# Allegro board BD95861MUVEVK-101_BRD_REV01_2014-01-22.brd
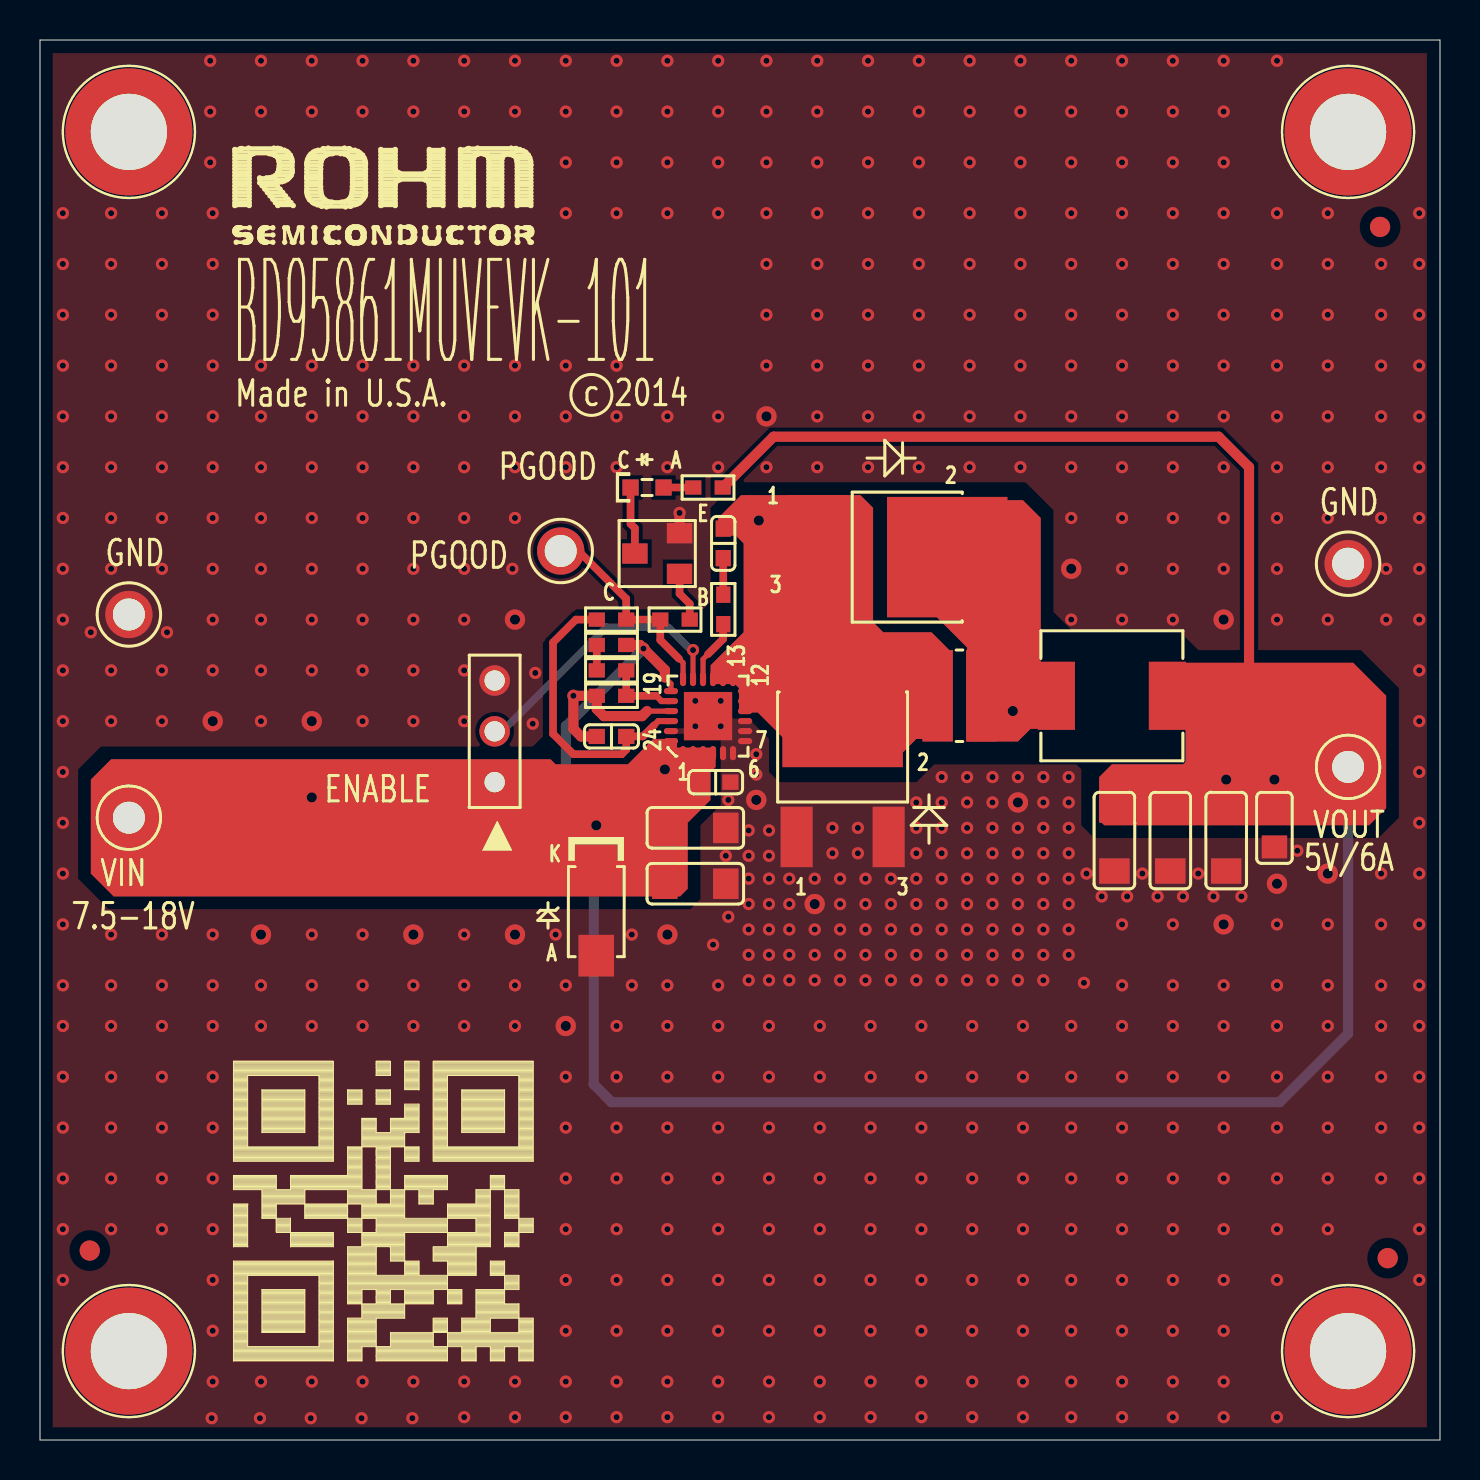
[diagram p0: board, top side]
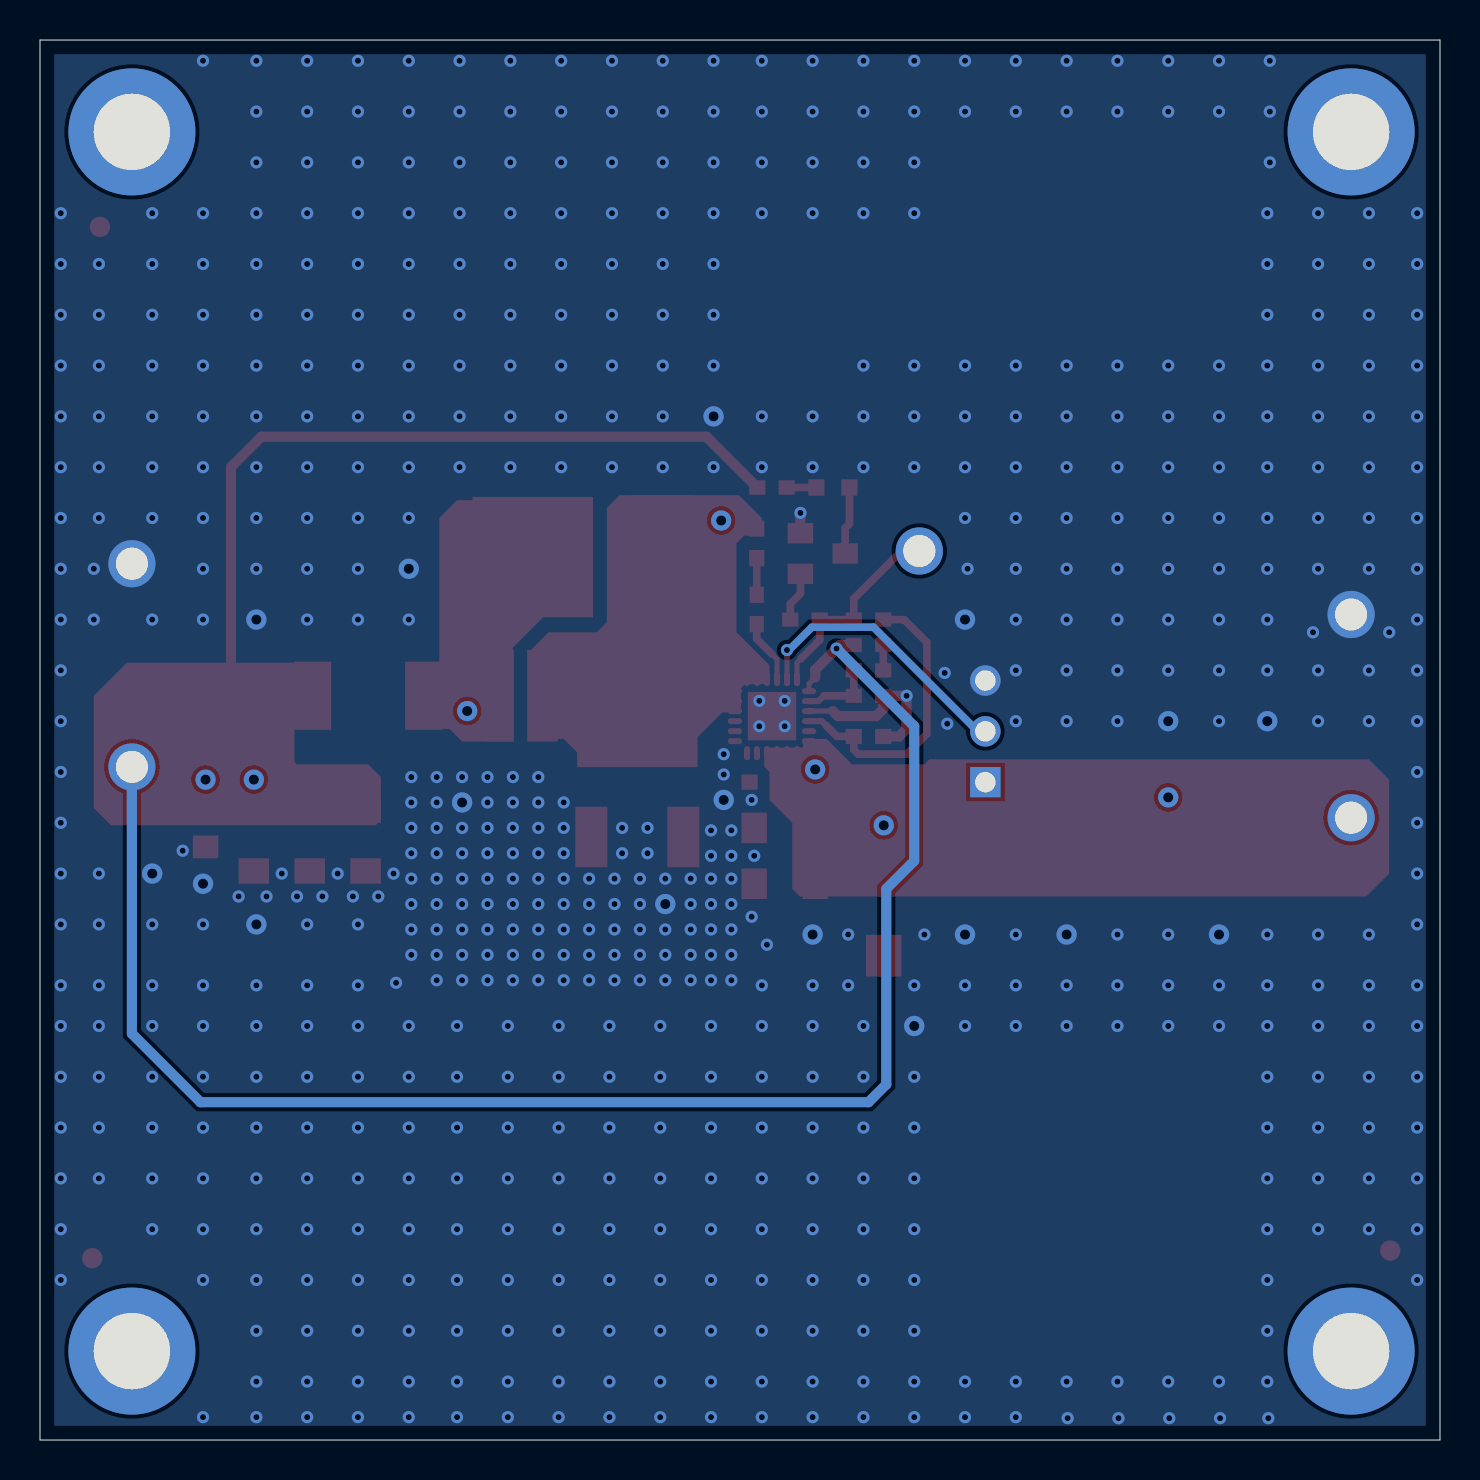
[diagram p1: board, bottom side, seen from below]

Outline 70 x 70 mm; copper layers: TOP, L2_GND, L3_GND, BOTTOM. Coordinates in mm from the lower left corner of the outline.
Outline path: 0,70 0,0 70,0 70,70 0,70

## Placement (name value [footprint] x y rotation side)
C1  10uF  [C1206]  32.77 27.81 0 top
C2  10uF  [C1206]  32.77 30.61 0 top
C3  0.1uF  [C0603]  34.16 44.83 90 top
C4  22uF  [C1206]  59.31 29.97 270 top
C5  22uF  [C1206]  56.52 29.97 270 top
C6  4.7uF  [C0603]  28.57 35.18 0 top
C7  0.47uF  [C0603]  33.78 32.89 180 top
C8  Val  [C1206]  53.72 29.97 270 top
C9  Val  [C0805]  61.72 30.61 270 top
CR1  SML-310MTT86  [LED_0603]  30.35 47.62 270 top
D1  SMAJ15A  [DO-214AC]  27.81 26.42 270 top
D2  RB085B-30TL  [CPD]  40.13 33.4 0 top
D3  RB085B-30TL  [CPD]  42.11 44.14 270 top
J1  87224-3  [HDR_THVT_1X3_100]  22.73 32.89 90 top
L1  2.2uH  [SMT_7P1X6P5]  53.59 37.21 0 top
NOREF  -  []  70 0 90 top
NOREF#2  -  []  -12.5 -32.37 0 top
NOREF#3  -  [unnamed#2]  67 60.65 0 top
NOREF#4  -  [unnamed#2]  67.39 9.09 0 top
NOREF#5  -  [unnamed#3]  4.45 4.45 0 top
NOREF#6  -  [unnamed#3]  4.45 65.41 0 top
NOREF#7  -  [unnamed#3]  65.41 65.41 0 top
NOREF#8  -  [unnamed#2]  2.49 9.47 0 top
NOREF#9  -  []  0 70 0 top
NOREF#10  -  [unnamed#3]  65.41 4.45 0 top
Q1  SST2222AT116  [SOT23_BEC]  30.86 44.32 90 top
R1  20  [R0603]  34.16 41.53 270 top
R2  24K  [R0603]  28.57 38.48 0 top
R3  680  [R0603]  28.57 39.75 180 top
R4  4.7K  [R0603]  28.57 37.21 0 top
R5  100K  [R0603]  28.57 41.02 180 top
R6  1K  [R0603]  31.75 41.02 0 top
R7  140  [R0603]  33.4 47.62 0 top
TP1  TP_63Mil_TH  [TP_TH]  4.45 31.12 0 top
TP2  TP_63Mil_TH  [TP_TH]  65.41 33.66 0 top
TP3  TP_63Mil_TH  [TP_TH]  4.45 41.27 0 top
TP4  TP_63Mil_TH  [TP_TH]  65.41 43.81 0 top
TP5  TP_63Mil_TH  [TP_TH]  26.04 44.45 0 top
U1  BD95861MUV  [VQFN024V4040]  33.4 36.2 90 top
ZX1  0  [SM_180X060]  45.97 37.21 180 top

## Library data of the parts
C1 C2 = CAP1206_10uF_25V_20%
C3 = CAP0603_0.1uF_50V_10%
C4 C5 = CAP1206_22uF_6.3V_10%
C6 = CAP1206_4.7uF_16V_10%
C7-C9 = CAP_VER
CR1 = LED_0603_GREEN
D1 = DIODE_ZENER_18.2V_400W
D2 D3 = DIODE_RB085B-30TL_30V/10A_DNP
J1 = CONN PCB 3x1_.100"
L1 = IND_2.2uH_8.2A
Q1 = NPN_0
R1 = R0603_20_1/10W_5%
R2 = R0603_24K_1/10W_1%
R3 = R0603_680_1/10W_1%
R4 = R0603_4.7K_1/10W_1%
R5 = R0603_100K_1/10W_5%
R6 = R0603_1K_1/10W_5%
R7 = R0603_140_1/10W_1%
TP1-TP5 = TP_63Mil_TH
U1 = IC_BD95861MUV_VQFN024V4040
ZX1 = ZX0603_0

## Footprints (pads in the part's own frame, mm; a bottom-side part is the same pattern mirrored in y, then rotated)
C0603
  rect 0.813x0.762 smd: 1(0.737,0) 2(-0.737,0)
C0805
  rect 1.143x1.27 smd: 1(-0.953,0) 2(0.953,0)
C1206
  rect 1.27x1.524 smd: 1(-1.524,0) 2(1.524,0)
CPD
  rect 1.6x3.023 smd: 1(-2.3,-3.25) 3(2.3,-3.25)
  rect 6.02x6.02 smd: 2(0,3.25)
DO-214AC
  rect 2.083x1.778 smd: 1(-2.2,0) 2(2.2,0)
HDR_THVT_1X3_100
  rect 1.524x1.524 hole 1.016: 1(0,0)
  round 1.524 hole 1.016: 2(2.54,0) 3(5.08,0)
LED_0603
  rect 0.813x0.813 smd: 1(0,-0.825) 2(0,0.825)
R0603
  rect 0.813x0.711 smd: 1(0.737,0) 2(-0.737,0)
SM_180X060
  rect 1.524x4.572 smd: 1(1.092,0) 2(-1.092,0)
SMT_7P1X6P5
  rect 1.854x3.404 smd: 1(-2.775,0) 2(2.775,0)
SOT23_BEC
  rect 1.016x1.27 smd: B(-1.016,-1.118) C(0,1.118) E(1.016,-1.118)
TP_TH
  round 2.362 hole 1.6: 1(0,0)
unnamed#2
  round 1.016 smd: 1(0,0)
unnamed#3
  round 6.35 hole 3.81: (0,0)
VQFN024V4040
  oval 0.711x0.305 smd: 1(-1.853,1.25) 2(-1.853,0.75) 3(-1.853,0.25) 4(-1.853,-0.25) 5(-1.853,-0.75) 6(-1.853,-1.25) 13(1.853,-1.25) 14(1.853,-0.75) 15(1.853,-0.25) 16(1.853,0.25) 17(1.853,0.75) 18(1.853,1.25)
  oval 0.305x0.711 smd: 7(-1.25,-1.853) 8(-0.75,-1.853) 9(-0.25,-1.853) 10(0.25,-1.853) 11(0.75,-1.853) 12(1.25,-1.853) 19(1.25,1.853) 20(0.75,1.853) 21(0.25,1.853) 22(-0.25,1.853) 23(-0.75,1.853) 24(-1.25,1.853)
  rect 2.413x2.413 smd: 25(0,0)

## Nets
GND: C1.2 C2.2 C4.2 C5.2 C6.2 C7.2 C8.2 C9.2 D1.2(A) D2.1 D2.3 J1.3 Q1.E(2) R4.2 TP3.1 TP4.1 U1.5(PGND1) U1.6(PGND2) U1.7(PGND3) U1.8(PGND4) U1.9(PGND5) U1.21(GND) U1.23(TEST) U1.25(THERMAL)
VIN: C1.1 C2.1 C7.1 D1.1(C) J1.1 TP1.1 U1.1(VIN1) U1.2(VIN2) U1.3(VIN3) U1.4(VIN4) U1.24(VIN5)
BOOT: R1.1 U1.16(BOOT)
BOOT_R: C3.2 R1.2
EN: J1.2 U1.17(EN)
FB: R2.1 R4.1 U1.20(FB)
FB_R: R2.2 R3.1
PGOOD: R5.2 R6.2 TP5.1 U1.18(PGOOD)
PGOOD_B: Q1.B(1) R6.1
PGOOD_C: CR1.1(C) Q1.C(3)
PGOOD_LED: CR1.2(A) R7.2
SW: C3.1 D2.2 D3.1 D3.3 U1.10(SW1) U1.11(SW2) U1.12(SW3) U1.13(SW4) U1.14(SW5) U1.15(SW6) ZX1.1
SW_ZX: D3.2 L1.1 ZX1.2
VOUT: C4.1 C5.1 C8.1 C9.1 L1.2 R3.2 R7.1 TP2.1 U1.19(VOUT)
VREG: C6.1 R5.1 U1.22(VREG)

Pads without a net: NOREF#3 1; NOREF#4 1; NOREF#8 1

## Via types
v1: diameter 1.016, hole 0.508, TOP to BOTTOM, 24 vias
v2: diameter 0.61, hole 0.305, TOP to BOTTOM, 626 vias

## Routing (per net, layer and track width the routed paths; a pad name or vN(x,y) marks a point on that pad's centre or on a via; arc(x,y) is an arc through that point)
GND: length 40.8
  TOP w0.254: U1.21 30.35,36.44
  TOP w0.508: Q1.E v2(31.98,46.35) ; 30.35,36.44 30.1,36.2 28.19,36.2 27.84,36.55 R4.2 v2(26.67,37.21) 26.67,35.56 27.05,35.18 C6.2
  L2_GND w0.508: 22.02,38.69 J1.3 ; J1.3 22.02,37.26 ; J1.3 23.45,37.26 ; J1.3 23.45,38.69 ; 64.39,44.83 TP4.1 ; TP4.1 66.42,42.8 ; TP4.1 66.42,44.83 ; TP4.1 64.39,42.8 ; 3.43,42.29 TP3.1 ; TP3.1 5.46,42.29 ; TP3.1 3.43,40.26 ; TP3.1 5.46,40.26
  L3_GND w0.508: 64.39,44.83 TP4.1 ; TP4.1 64.39,42.8 ; TP4.1 66.42,44.83 ; TP4.1 66.42,42.8 ; J1.3 23.45,38.69 ; J1.3 23.45,37.26 ; J1.3 22.02,38.69 ; J1.3 22.02,37.26 ; 3.43,42.29 TP3.1 ; TP3.1 3.43,40.26 ; TP3.1 5.46,42.29 ; TP3.1 5.46,40.26
  vias: v1(8.64,35.94) v1(11.05,25.27) v1(13.59,35.94) v1(18.67,25.27) v1(23.75,41.02) v1(23.75,25.27) v1(26.29,20.7) v1(31.37,25.27) v1(35.81,32) v1(36.32,51.18) v1(38.73,26.8) v1(48.9,31.88) v1(51.56,43.56) v1(59.18,41.02) v1(59.18,25.78) v1(61.85,27.81) v1(64.39,28.32) v2(1.14,61.34) v2(1.14,58.8) v2(1.14,56.26) v2(1.14,53.72) v2(1.14,51.18) v2(1.14,48.64) v2(1.14,46.1) v2(1.14,43.56) v2(1.14,41.02) v2(1.14,38.48) v2(1.14,35.94) v2(1.14,33.4) v2(1.14,30.86) v2(1.14,28.32) v2(1.14,25.78) v2(1.14,22.73) v2(1.14,20.7) v2(1.14,18.16) v2(1.14,15.62) v2(1.14,13.08) v2(1.14,10.54) v2(1.14,8) v2(2.54,40.39) v2(3.56,61.34) v2(3.56,58.8) v2(3.56,56.26) v2(3.56,53.72) v2(3.56,51.18) v2(3.56,48.64) v2(3.56,46.1) v2(3.56,43.56) v2(3.56,38.48) v2(3.56,35.94) v2(3.56,25.27) v2(3.56,22.73) v2(3.56,20.7) v2(3.56,18.16) v2(3.56,15.62) v2(3.56,13.08) v2(3.56,10.54) v2(6.1,61.34) v2(6.1,58.8) v2(6.1,56.26) v2(6.1,53.72) v2(6.1,51.18) v2(6.1,48.64) v2(6.1,46.1) v2(6.1,43.56) v2(6.1,38.48) v2(6.1,35.94) v2(6.1,25.27) v2(6.1,22.73) v2(6.1,20.7) v2(6.1,18.16) v2(6.1,15.62) v2(6.1,13.08) v2(6.1,10.54) v2(6.35,40.39) v2(8.51,68.96) v2(8.51,66.42) v2(8.51,63.88) v2(8.58,1.09) v2(8.64,61.34) v2(8.64,58.8) v2(8.64,56.26) v2(8.64,53.72) v2(8.64,51.18) v2(8.64,48.64) v2(8.64,46.1) v2(8.64,43.56) v2(8.64,41.02) v2(8.64,38.48) v2(8.64,25.27) v2(8.64,22.73) v2(8.64,20.7) v2(8.64,18.16) v2(8.64,15.62) v2(8.64,13.08) v2(8.64,10.54) v2(8.64,8) v2(8.64,5.46) v2(8.64,2.92) v2(11.05,68.96) v2(11.05,66.42) v2(11.05,53.72) v2(11.05,51.18) v2(11.05,48.64) v2(11.05,46.1) v2(11.05,43.56) v2(11.05,41.02) v2(11.05,38.48) v2(11.05,35.94) v2(11.05,22.73) v2(11.05,20.7) v2(11.05,2.92) v2(11,1.09) v2(13.59,68.96) v2(13.59,66.42) v2(13.59,53.72) v2(13.59,51.18) v2(13.59,48.64) v2(13.59,46.1) v2(13.59,43.56) v2(13.59,41.02) v2(13.59,38.48) v2(13.59,25.27) v2(13.59,22.73) v2(13.59,20.7) v2(13.59,2.92) v2(13.54,1.09) v2(16.08,1.09) v2(16.13,68.96) v2(16.13,66.42) v2(16.13,53.72) v2(16.13,51.18) v2(16.13,48.64) v2(16.13,46.1) v2(16.13,43.56) v2(16.13,41.02) v2(16.13,38.48) v2(16.13,35.94) v2(16.13,25.27) v2(16.13,22.73) v2(16.13,20.7) v2(16.13,2.92) v2(18.67,68.96) v2(18.67,66.42) v2(18.67,53.72) v2(18.67,51.18) v2(18.67,48.64) v2(18.67,46.1) v2(18.67,43.56) v2(18.67,41.02) v2(18.67,38.48) v2(18.67,35.94) v2(18.67,22.73) v2(18.67,20.7) v2(18.67,2.92) v2(18.62,1.09) v2(21.21,68.96) v2(21.21,66.42) v2(21.21,53.72) v2(21.21,51.18) v2(21.21,48.64) v2(21.21,46.1) v2(21.21,43.56) v2(21.21,41.02) v2(21.21,38.48) v2(21.21,35.94) v2(21.21,25.27) v2(21.21,22.73) v2(21.21,20.7) v2(21.21,2.92) v2(21.21,1.14) v2(23.62,43.56) v2(23.75,68.96) v2(23.75,66.42) v2(23.75,53.72) v2(23.75,51.18) v2(23.75,48.64) v2(23.75,46.1) v2(23.75,22.73) v2(23.75,20.7) v2(23.75,2.92) v2(23.75,1.14) v2(24.64,35.81) v2(24.77,38.35) v2(25.78,25.27) v2(26.29,68.96) v2(26.29,66.42) v2(26.29,63.88) v2(26.29,61.34) v2(26.29,53.72) v2(26.29,51.18) v2(26.29,48.64) v2(26.29,22.73) v2(26.29,18.16) v2(26.29,15.62) v2(26.29,13.08) v2(26.29,10.54) v2(26.29,8) v2(26.29,5.46) v2(26.29,2.92) v2(26.29,1.14) v2(28.83,68.96) v2(28.83,66.42) v2(28.83,63.88) v2(28.83,61.34) v2(28.83,53.72) v2(28.83,51.18) v2(28.83,48.64) v2(28.83,20.7) v2(28.83,18.16) v2(28.83,15.62) v2(28.83,13.08) v2(28.83,10.54) v2(28.83,8) v2(28.83,5.46) v2(28.83,2.92) v2(28.83,1.14) v2(29.59,25.27) v2(29.59,22.73) v2(31.37,68.96) v2(31.37,66.42) v2(31.37,63.88) v2(31.37,61.34) v2(31.37,51.18) v2(31.37,48.64) v2(31.37,22.73) v2(31.37,20.7) v2(31.37,18.16) v2(31.37,15.62) v2(31.37,13.08) v2(31.37,10.54) v2(31.37,8) v2(31.37,5.46) v2(31.37,2.92) v2(31.37,1.14) v2(32.77,36.96) v2(32.77,35.69) v2(33.66,24.77) v2(33.91,68.96) v2(33.91,66.42) v2(33.91,63.88) v2(33.91,61.34) v2(33.91,51.18) v2(33.91,48.64) v2(33.91,22.73) v2(33.91,20.7) v2(33.91,18.16) v2(33.91,15.62) v2(33.91,13.08) v2(33.91,10.54) v2(33.91,8) v2(33.91,5.46) v2(33.91,2.92) v2(33.91,1.14) v2(34.04,36.96) v2(34.04,35.69) v2(34.29,29.21) v2(34.42,32) v2(34.42,26.16) v2(35.43,30.48) v2(35.43,29.21) v2(35.43,28.07) v2(35.43,26.8) v2(35.43,25.53) v2(35.43,24.26) v2(35.43,22.99) v2(35.81,34.29) v2(35.81,33.27) v2(36.32,68.96) v2(36.32,66.42) v2(36.32,63.88) v2(36.32,61.34) v2(36.32,58.8) v2(36.32,56.26) v2(36.32,53.72) v2(36.32,48.64) v2(36.45,30.48) v2(36.45,29.21) v2(36.45,28.07) v2(36.45,26.8) v2(36.45,25.53) v2(36.45,24.26) v2(36.45,22.99) v2(36.45,20.7) v2(36.45,18.16) v2(36.45,15.62) v2(36.45,13.08) v2(36.45,10.54) v2(36.45,8) v2(36.45,5.46) v2(36.45,2.92) v2(36.45,1.14) v2(37.47,28.07) v2(37.47,26.8) v2(37.47,25.53) v2(37.47,24.26) v2(37.47,22.99) v2(38.73,28.07) v2(38.73,25.53) v2(38.73,24.26) v2(38.73,22.99) v2(38.86,68.96) v2(38.86,66.42) v2(38.86,63.88) v2(38.86,61.34) v2(38.86,58.8) v2(38.86,56.26) v2(38.86,53.72) v2(38.86,51.18) v2(38.86,48.64) v2(38.99,20.7) v2(38.99,18.16) v2(38.99,15.62) v2(38.99,13.08) v2(38.99,10.54) v2(38.99,8) v2(38.99,5.46) v2(38.99,2.92) v2(38.99,1.14) v2(39.62,30.61) v2(39.62,29.34) v2(40.01,28.07) v2(40.01,26.8) v2(40.01,25.53) v2(40.01,24.26) v2(40.01,22.99) v2(40.89,30.61) v2(40.89,29.34) v2(41.27,28.07) v2(41.27,26.8) v2(41.27,25.53) v2(41.27,24.26) v2(41.27,22.99) v2(41.4,68.96) v2(41.4,66.42) v2(41.4,63.88) v2(41.4,61.34) v2(41.4,58.8) v2(41.4,56.26) v2(41.4,53.72) v2(41.4,51.18) v2(41.4,48.64) v2(41.53,20.7) v2(41.53,18.16) v2(41.53,15.62) v2(41.53,13.08) v2(41.53,10.54) v2(41.53,8) v2(41.53,5.46) v2(41.53,2.92) v2(41.53,1.14) v2(42.55,28.07) v2(42.55,26.8) v2(42.55,25.53) v2(42.55,24.26) v2(42.55,22.99) v2(43.81,31.88) v2(43.81,30.61) v2(43.81,29.34) v2(43.81,28.07) v2(43.81,26.8) v2(43.81,25.53) v2(43.81,24.26) v2(43.81,22.99) v2(43.94,68.96) v2(43.94,66.42) v2(43.94,63.88) v2(43.94,61.34) v2(43.94,58.8) v2(43.94,56.26) v2(43.94,53.72) v2(43.94,51.18) v2(43.94,48.64) v2(44.07,20.7) v2(44.07,18.16) v2(44.07,15.62) v2(44.07,13.08) v2(44.07,10.54) v2(44.07,8) v2(44.07,5.46) v2(44.07,2.92) v2(44.07,1.14) v2(45.09,33.15) v2(45.09,31.88) v2(45.09,30.61) v2(45.09,29.34) v2(45.09,28.07) v2(45.09,26.8) v2(45.09,25.53) v2(45.09,24.26) v2(45.09,22.99) v2(46.35,33.15) v2(46.35,31.88) v2(46.35,30.61) v2(46.35,29.34) v2(46.35,28.07) v2(46.35,26.8) v2(46.35,25.53) v2(46.35,24.26) v2(46.35,22.99) v2(46.48,68.96) v2(46.48,66.42) v2(46.48,63.88) v2(46.48,61.34) v2(46.48,58.8) v2(46.48,56.26) v2(46.48,53.72) v2(46.48,51.18) v2(46.48,48.64) v2(46.61,20.7) v2(46.61,18.16) v2(46.61,15.62) v2(46.61,13.08) v2(46.61,10.54) v2(46.61,8) v2(46.61,5.46) v2(46.61,2.92) v2(46.61,1.14) v2(47.62,33.15) v2(47.62,31.88) v2(47.62,30.61) v2(47.62,29.34) v2(47.62,28.07) v2(47.62,26.8) v2(47.62,25.53) v2(47.62,24.26) v2(47.62,22.99) v2(48.9,33.15) v2(48.9,30.61) v2(48.9,29.34) v2(48.9,28.07) v2(48.9,26.8) v2(48.9,25.53) v2(48.9,24.26) v2(48.9,22.99) v2(49.02,68.96) v2(49.02,66.42) v2(49.02,63.88) v2(49.02,61.34) v2(49.02,58.8) v2(49.02,56.26) v2(49.02,53.72) v2(49.02,51.18) v2(49.02,48.64) v2(49.15,20.7) v2(49.15,18.16) v2(49.15,15.62) v2(49.15,13.08) v2(49.15,10.54) v2(49.15,8) v2(49.15,5.46) v2(49.15,2.92) v2(49.15,1.14) v2(50.16,33.15) v2(50.16,31.88) v2(50.16,30.61) v2(50.16,29.34) v2(50.16,28.07) v2(50.16,26.8) v2(50.16,25.53) v2(50.16,24.26) v2(50.16,22.99) v2(51.44,33.15) v2(51.44,31.88) v2(51.44,30.61) v2(51.44,29.34) v2(51.44,28.07) v2(51.44,26.8) v2(51.44,25.53) v2(51.44,24.26) v2(51.56,68.96) v2(51.56,66.42) v2(51.56,63.88) v2(51.56,61.34) v2(51.56,58.8) v2(51.56,56.26) v2(51.56,53.72) v2(51.56,51.18) v2(51.56,48.64) v2(51.56,46.1) v2(51.56,41.02) v2(51.56,20.7) v2(51.56,18.16) v2(51.56,15.62) v2(51.56,13.08) v2(51.56,10.54) v2(51.56,8) v2(51.56,5.46) v2(51.56,2.92) v2(51.56,1.14) v2(52.2,22.86) v2(52.32,28.32) v2(53.09,27.18) v2(54.1,68.96) v2(54.1,66.42) v2(54.1,63.88) v2(54.1,61.34) v2(54.1,58.8) v2(54.1,56.26) v2(54.1,53.72) v2(54.1,51.18) v2(54.1,48.64) v2(54.1,46.1) v2(54.1,43.56) v2(54.1,41.02) v2(54.1,25.78) v2(54.1,22.73) v2(54.1,20.7) v2(54.1,18.16) v2(54.1,15.62) v2(54.1,13.08) v2(54.1,10.54) v2(54.1,8) v2(54.1,5.46) v2(54.1,2.92) v2(54.1,1.14) v2(54.36,27.18) v2(55.12,28.32) v2(55.88,27.18) v2(56.64,68.96) v2(56.64,66.42) v2(56.64,63.88) v2(56.64,61.34) v2(56.64,58.8) v2(56.64,56.26) v2(56.64,53.72) v2(56.64,51.18) v2(56.64,48.64) v2(56.64,46.1) v2(56.64,43.56) v2(56.64,41.02) v2(56.64,25.78) v2(56.64,22.73) v2(56.64,20.7) v2(56.64,18.16) v2(56.64,15.62) v2(56.64,13.08) v2(56.64,10.54) v2(56.64,8) v2(56.64,5.46) v2(56.64,2.92) v2(56.64,1.14) v2(57.15,27.18) v2(57.91,28.32) v2(58.67,27.18) v2(59.18,68.96) v2(59.18,66.42) v2(59.18,63.88) v2(59.18,61.34) v2(59.18,58.8) v2(59.18,56.26) v2(59.18,53.72) v2(59.18,51.18) v2(59.18,48.64) v2(59.18,46.1) v2(59.18,43.56) v2(59.18,22.73) v2(59.18,20.7) v2(59.18,18.16) v2(59.18,15.62) v2(59.18,13.08) v2(59.18,10.54) v2(59.18,8) v2(59.18,5.46) v2(59.18,2.92) v2(59.18,1.14) v2(60.07,27.18) v2(61.85,68.96) v2(61.85,61.34) v2(61.85,58.8) v2(61.85,56.26) v2(61.85,53.72) v2(61.85,51.18) v2(61.85,48.64) v2(61.85,46.1) v2(61.85,43.56) v2(61.85,41.02) v2(61.85,25.78) v2(61.85,22.73) v2(61.85,20.7) v2(61.85,18.16) v2(61.85,15.62) v2(61.85,13.08) v2(61.85,10.54) v2(61.85,8) v2(61.85,1.14) v2(62.87,29.46) v2(64.39,61.34) v2(64.39,58.8) v2(64.39,56.26) v2(64.39,53.72) v2(64.39,51.18) v2(64.39,48.64) v2(64.39,46.1) v2(64.39,41.02) v2(64.39,25.78) v2(64.39,22.73) v2(64.39,20.7) v2(64.39,18.16) v2(64.39,15.62) v2(64.39,13.08) v2(64.39,10.54) v2(67.06,58.8) v2(67.06,56.26) v2(67.06,53.72) v2(67.06,51.18) v2(67.06,48.64) v2(67.06,46.1) v2(67.06,28.32) v2(67.06,25.78) v2(67.06,22.73) v2(67.06,20.7) v2(67.06,18.16) v2(67.06,15.62) v2(67.06,13.08) v2(67.31,43.56) v2(67.31,41.02) v2(68.96,61.34) v2(68.96,58.8) v2(68.96,56.26) v2(68.96,53.72) v2(68.96,51.18) v2(68.96,48.64) v2(68.96,46.1) v2(68.96,43.56) v2(68.96,41.02) v2(68.96,38.48) v2(68.96,35.94) v2(68.96,33.4) v2(68.96,30.86) v2(68.96,28.32) v2(68.96,25.78) v2(68.96,22.73) v2(68.96,20.7) v2(68.96,18.16) v2(68.96,15.62) v2(68.96,13.08) v2(68.96,10.54) v2(68.96,8)
VIN:
  vias: v1(13.59,32.13) v1(27.81,30.73) v1(31.24,33.53)
BOOT: length 3.2
  TOP w0.254: U1.16 33.15,39.04 33.4,39.29
  TOP w0.381: 33.4,39.29 34.16,40.06 R1.1
BOOT_R: length 1.8
  TOP w0.381: C3.2 R1.2
EN: length 14.1
  TOP w0.254: U1.17 v2(32.65,39.5)
  BOTTOM w0.381: J1.2 23.11,35.43 28.32,40.64 31.4,40.64 32.65,39.39 v2(32.65,39.5)
FB: length 3.6
  TOP w0.305: 30.81,37.21 31.07,36.95 U1.20
  TOP w0.381: 30.81,37.21 R4.1 R2.1
FB_R: length 1.3
  TOP w0.381: R3.1 R2.2
PGOOD: length 10.5
  TOP w0.254: 31.95,39.06 32.15,38.86 U1.18
  TOP w0.381: 31.95,39.06 31.01,40 R6.2 R5.2 29.31,42.06 26.92,44.45 TP5.1
PGOOD_B: length 2.5
  TOP w0.381: R6.1 32.49,41.81 31.98,42.32 Q1.B
PGOOD_C: length 3.4
  TOP w0.381: CR1.1 29.53,45.81 29.74,45.59 Q1.C
PGOOD_LED: length 1.5
  TOP w0.381: R7.2 CR1.2
SW:
  vias: v1(35.94,45.97)
SW_ZX:
  vias: v1(48.64,36.45)
VOUT: length 119.4
  TOP w0.254: U1.19 31.55,37.82 31.24,38.12
  TOP w0.508: R7.1 36.68,50.16 58.93,50.16 60.45,48.64 60.45,37.72 ; R3.2 30,39.75 v2(30.17,39.57) 31.24,38.5 31.24,38.12
  BOTTOM w0.508: TP2.1 65.41,20.32 61.98,16.89 28.57,16.89 27.69,17.78 27.69,27.56 26.29,28.96 26.29,35.69 v2(30.17,39.57)
  vias: v1(59.31,33.02) v1(61.72,33.02)
VREG: length 14.6
  TOP w0.305: U1.22 30.91,35.95 30.69,35.73
  TOP w0.381: R5.1 26.8,41.02 25.65,39.88 25.65,35.31 26.67,34.29 29.08,34.29 29.31,34.52 C6.1 30.15,35.18 30.69,35.73

## Copper pours and planes (outline as drawn; the poured copper is in the pictures)
GND on TOP: 0.64,69.34 0.64,0.64 69.34,0.64 69.34,69.34 ; 1 cut-out
GND on BOTTOM: 0.71,69.29 0.71,0.71 69.29,0.71 69.29,69.29
GND on L2_GND, L3_GND: 0.64,69.34 0.64,0.64 69.34,0.64 69.34,69.34
VIN on TOP (solid shape): 31.85,34.62 33.78,34.62 33.78,33.66 33.53,33.4 33.53,32 32.39,30.86 32.39,27.56 32,27.18 3.68,27.18 2.54,28.32 2.54,33.02 3.56,34.04 25.53,34.04 25.78,33.78 29.39,33.78 30.66,35.05 31.85,35.05
SW on TOP (solid shape): 41.66,46.61 41.66,40.89 42.16,40.39 44.58,40.39 45.59,39.37 45.59,35.05 43.81,35.05 42.55,33.78 37.21,33.78 37.21,35.05 35.89,36.37 35.05,36.37 34.95,36.47 34.95,37.59 34.75,37.8 33.58,37.8 33.53,37.85 33.53,38.73 35.18,40.39 35.18,44.83 34.8,45.21 33.91,45.21 33.91,46.1 35.05,47.24 41.02,47.24
SW_ZX on TOP (solid shape): 50.04,46.1 50.04,38.86 51.69,38.86 51.69,35.56 49.53,35.56 48.9,34.92 46.35,34.92 46.35,39.62 44.7,41.27 42.42,41.27 42.42,46.99 49.15,46.99
VOUT on TOP (solid shape): 67.31,37.21 67.31,31.59 66.45,30.73 53.21,30.73 52.96,30.99 52.96,33.15 53.59,33.78 57.15,33.78 57.28,33.91 57.28,35.56 55.5,35.56 55.5,38.86 65.66,38.86

## Text on the board
Ref Des/Silkscreen Top: 7.5-18V | VIN | GND | Made in U.S.A. | ENABLE | PGOOD | c 2014 | 5V/6A | VOUT | BD95861MUVEVK-101
L2_GND: L2_GND
L3_GND: L3_GND
PAGE_OUTLINE: REV | DESCRIPTION | REVISIONS | DATE | APPROVED | D | C | B | A | 4 | 3 | 2
DIMENSION: 2.400 | 2.581 | .175 | 0
User.5: .1 | .03 | .010 | DECIMAL | UNLESS OTHERWISE | SPECIFIED DIMENSIONS | ARE IN INCHES | TOLERANCES | ANGLE | MACH FINISH | 30 | X | XX | XXX | DESIGNER: | CHECKER: | JOB#: | DATE: | 20140122 | PTHVDC | INITIAL | COMPANY NAME: | PROJECT NAME: | SHEET: | REV. | ROHM SEMICONDUCTOR USA | BD95861MUVEVK-101 | 01
User.18: FAB NUMBER: | FAB DRAWING | NUMBER | 1 OF 2 | 14. Rounding is allowed on 90 degree corners with the size of | 12. Inside corners should be rounded-off | 13. Changes to board geometries and apertures are not | 10. Bow and Twist | 11. Inspection | standard routing bit. | allowed unless they are approved by customer. | 4. Drilling | 5. Finish | 9. Packaging | 8. Cleanliness | 7. Electrical Test | 3. Soldermask | photoimageable soldermask, 003 max. thickness. | Soldermask over bare copper. | Soldermask is allowed in via holes. | Bow and twist to be .007 IN/IN or .090 max according to IPC-A-600D. | NOTES: | 2. Material | 6. Silkscreen | to conduct a thorough review of the artwork and media for | writing (in advance of manufacturing) of any changes, revisions,or | 1. Specifications. | as meaxured by the omega meter 600SMD. | A. All hole diameters are finished sizes. | B. All hole to be +/- .003 from true position unless otherwise specified. | C. All hole diameters to be +/- .003 unless otherwise specified. | D. An NC drill file has been supplied - see drill table. | A. Plate thru with copper .0010 min to .002 max. thickness drill size | dimension apply after plating. | B. Use gold immersion over nickel. | C. Finished boards shall not have nicks, | scratches, voids, exposed copper, poor plating, all misdrilled holes. | manufacturability in the supplier's process compliance to all | A. Boards shall be free of fiber glass dust or any other foreign material. | B. Finished boards must conform to 0.01 MG/IN max NAcL ionic contamination | A. All boards shall be 100% electrically tested for opens/short at 10 volts. | MIL-SPEC boards to be tested at 40 volts. | B. Apply test stamp in non-legend area on solder side of PCB. | C. Test is required on both sides of the board. | Solder mask both sides with (green color) liquid | A. FR406. | B. Color to be opaque. | A. Silkscreen using white non-conductive epoxy or equivalent (both sides). | B. No silkscreen allowed on exposed lands. | C. Silkscreen must be a minimum of 3mm away form fiducial marks. | D. Minimum clearance between silkscreen legend and vias, pads, or holes | to be .005. | E. Silkscreen is allowed in via holes. | There shall be a max of 25 units per package, individually wrapped, | and shipped in cardboard cratons with sufficient surrounding | material to prevend shipping damage. | A.Automatic optical inspection of all layers required. | B.The impedance should be controlled by stackup layer. | gerber and drill data when applicable. | A. Fabricate IAW  IPC600, latest revision. | B. Producibility study - It is the respondsibility  of the supplier | corrections made or recommendations to ensure conformance to | D. This drawing is to be used in conjunction with the provided | E. All notes are "Unless Otherwise Specified." | standards, and of  any specifications that  cannot be met. | applicable specifications. Customer must be advised in
User.30: Layer name | Prepreg | BOTTOM | L3_GND | TOP | L2_GND | L | 1 | TOTAL 62 MILs +/-10% thickness board | a | - | y | 4 | e | r | s | 41.20 | 2.70 | 5.00 | T | ( | m | h | C | i | c | u | l | k | ) | . | D | P | w | 2 oz | t | H | F | o | z | p | V
User.31: FIGURE | SIZE | 12.0 | 20.0 | 40.0 | 63.0 | 150.0 | DRILL CHART: TOP to BOTTOM | ALL UNITS ARE IN MILS | TOLERANCE | +3.0/-10.0 | +3.0/-3.0 | PLATED | QTY | 626 | 24 | 3 | 5 | 4
